# Altium PCB PCB1.PcbDoc
Units mil, origin at the board's own origin, x right, y up, seen from the top; angles counter-clockwise.
Board outline 1795 x 1645.78 mil, 2 copper layers (Top Layer, Bottom Layer); 63 components, 59 nets, 265 pads, 60 vias.
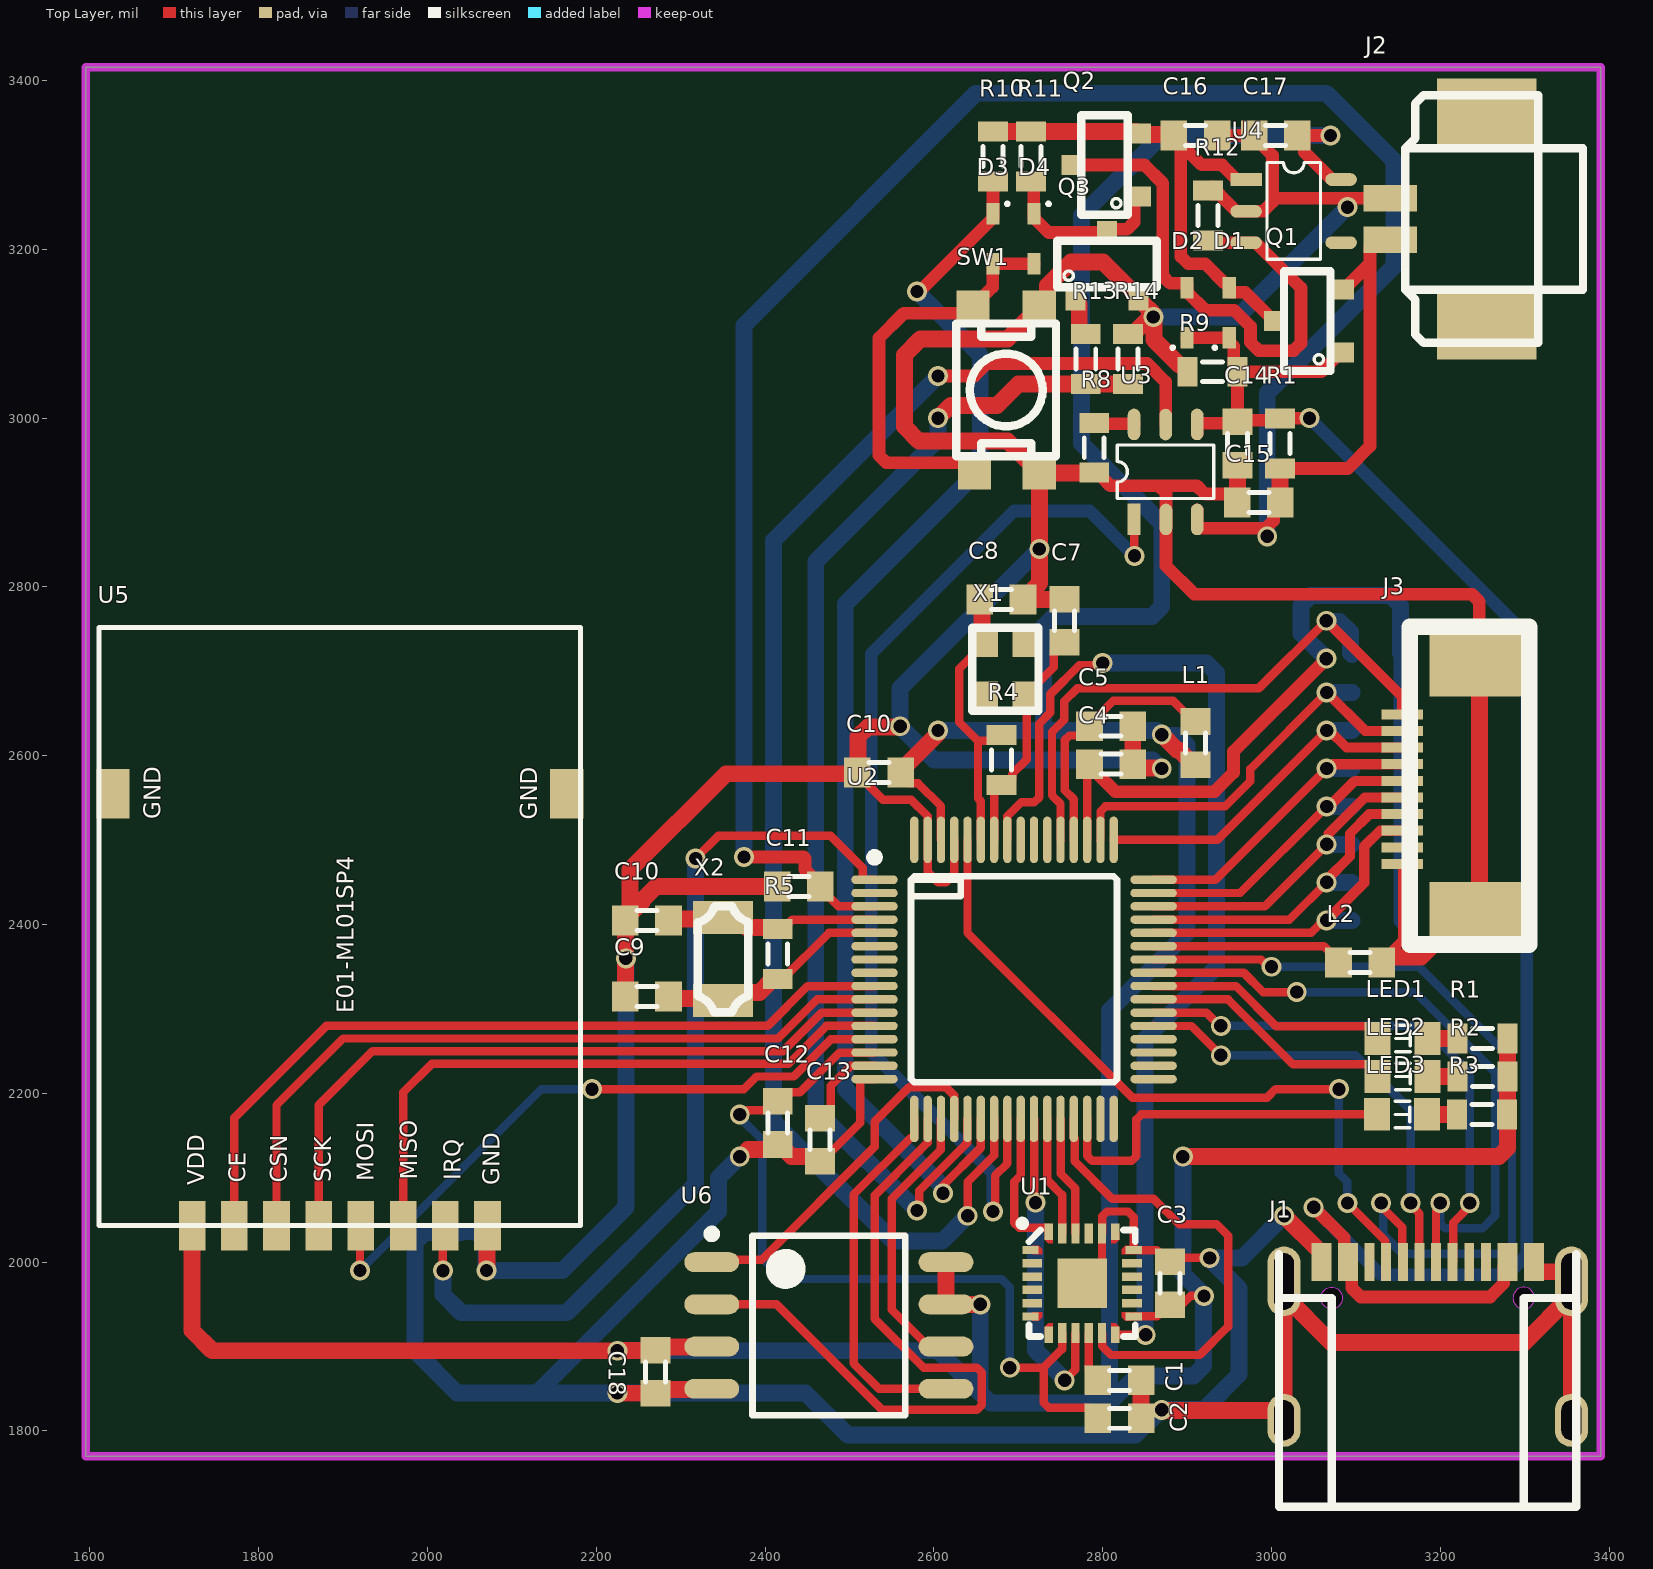
[diagram p0: Top Layer view]
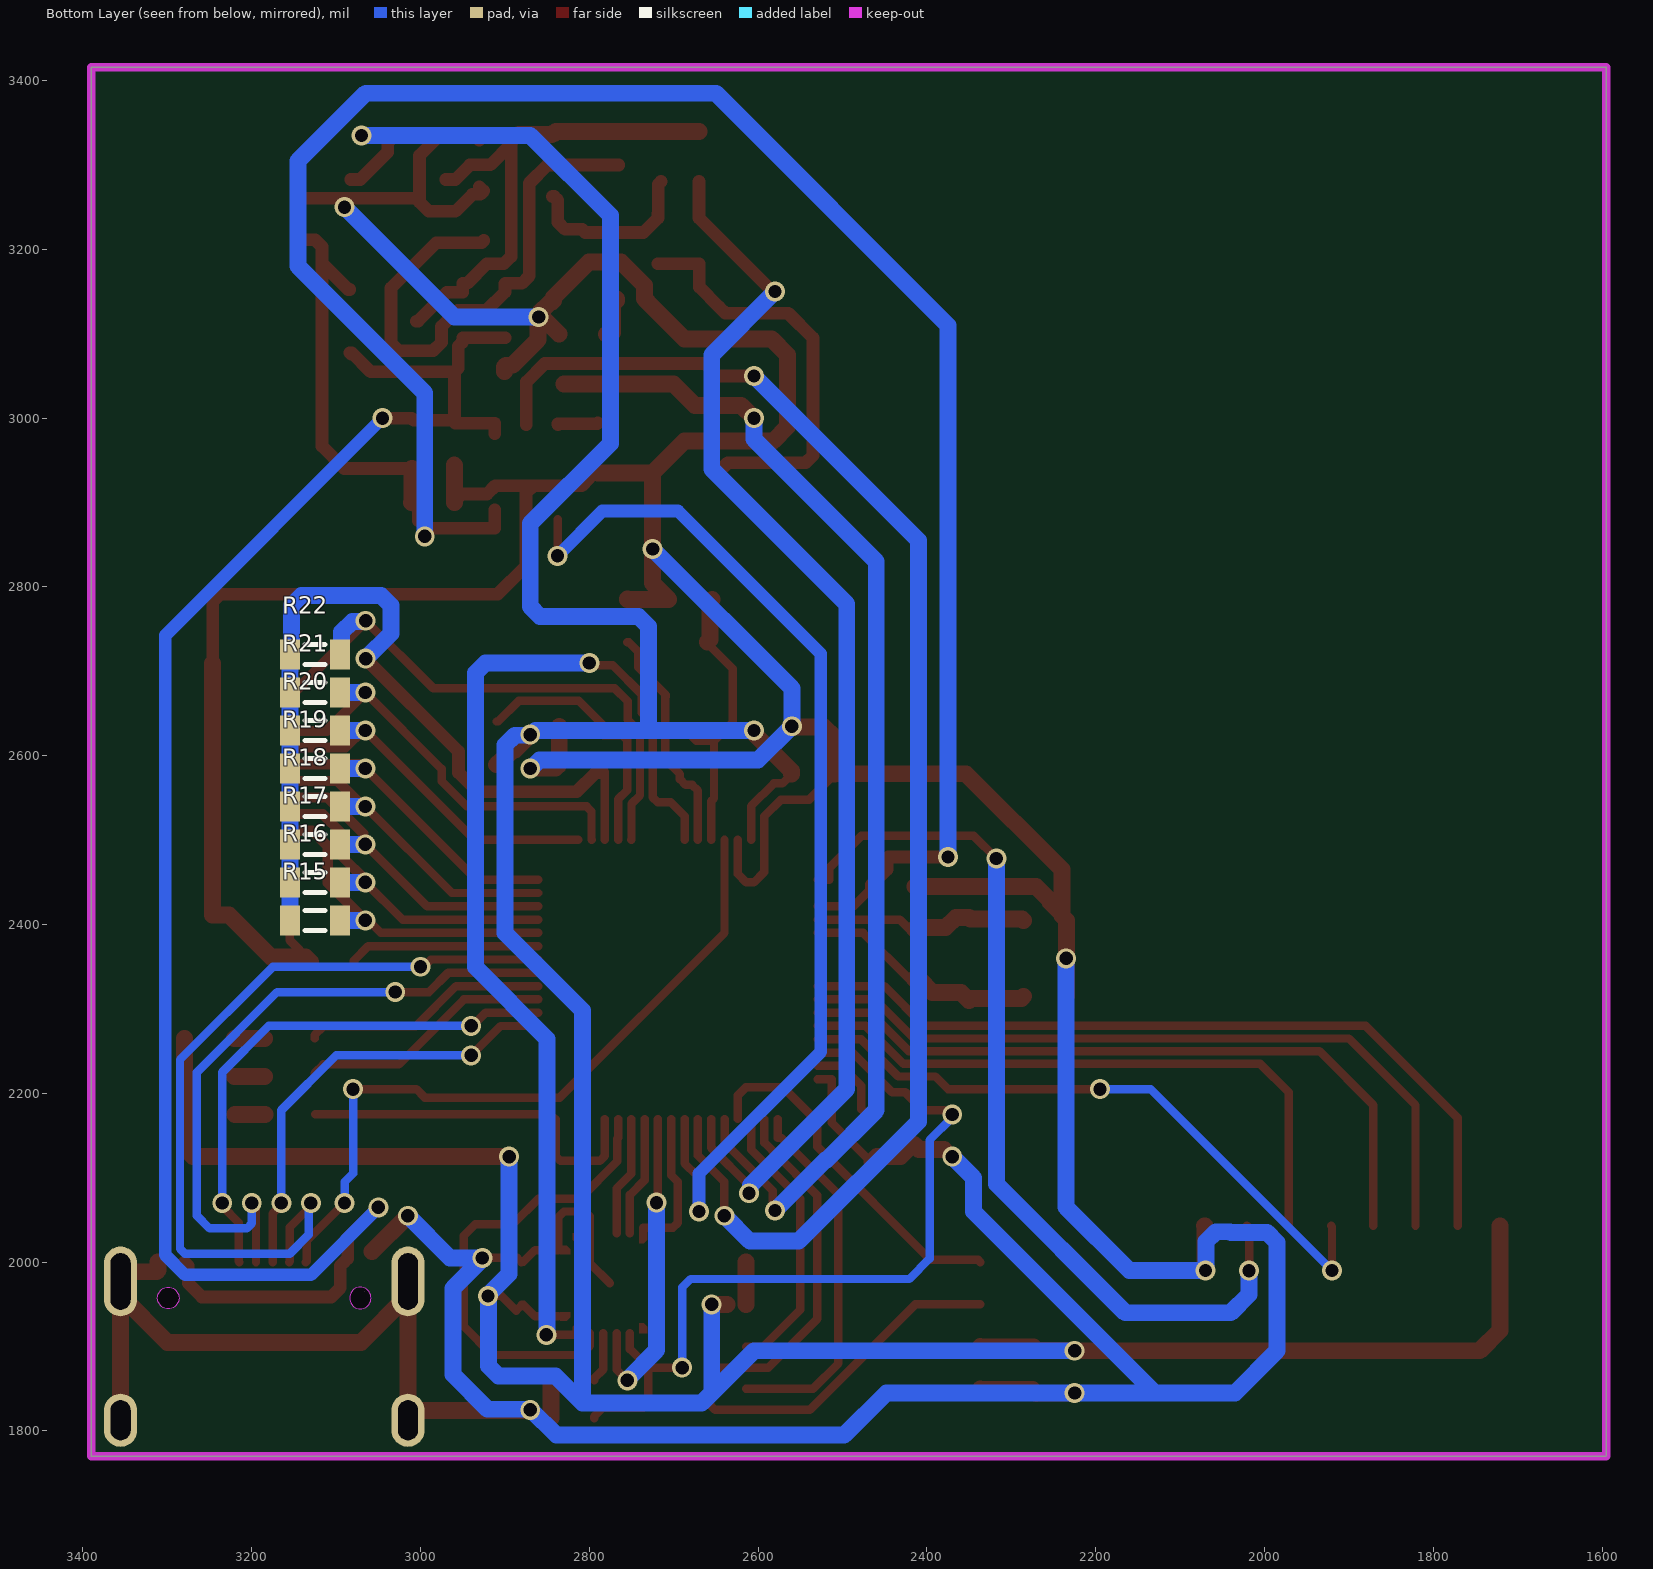
[diagram p1: Bottom Layer view, seen from below]
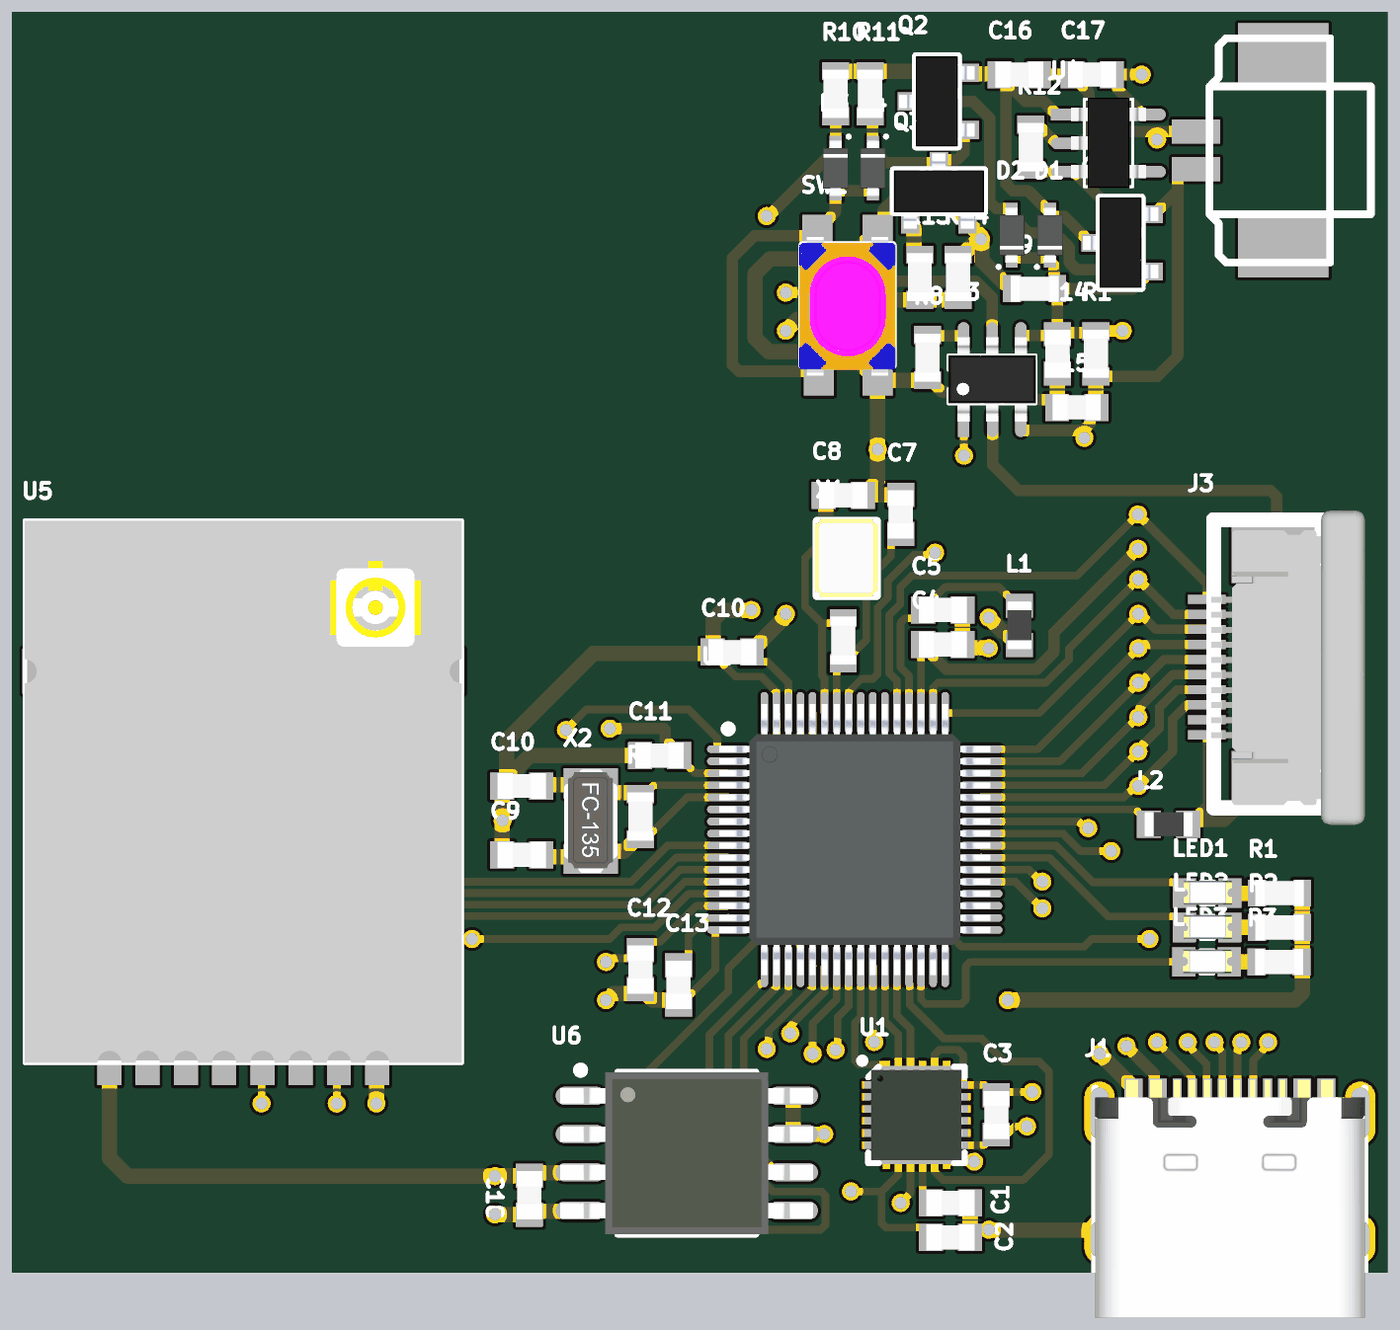
[diagram p2: 3D render of the assembled board from above, using the file's embedded part models]
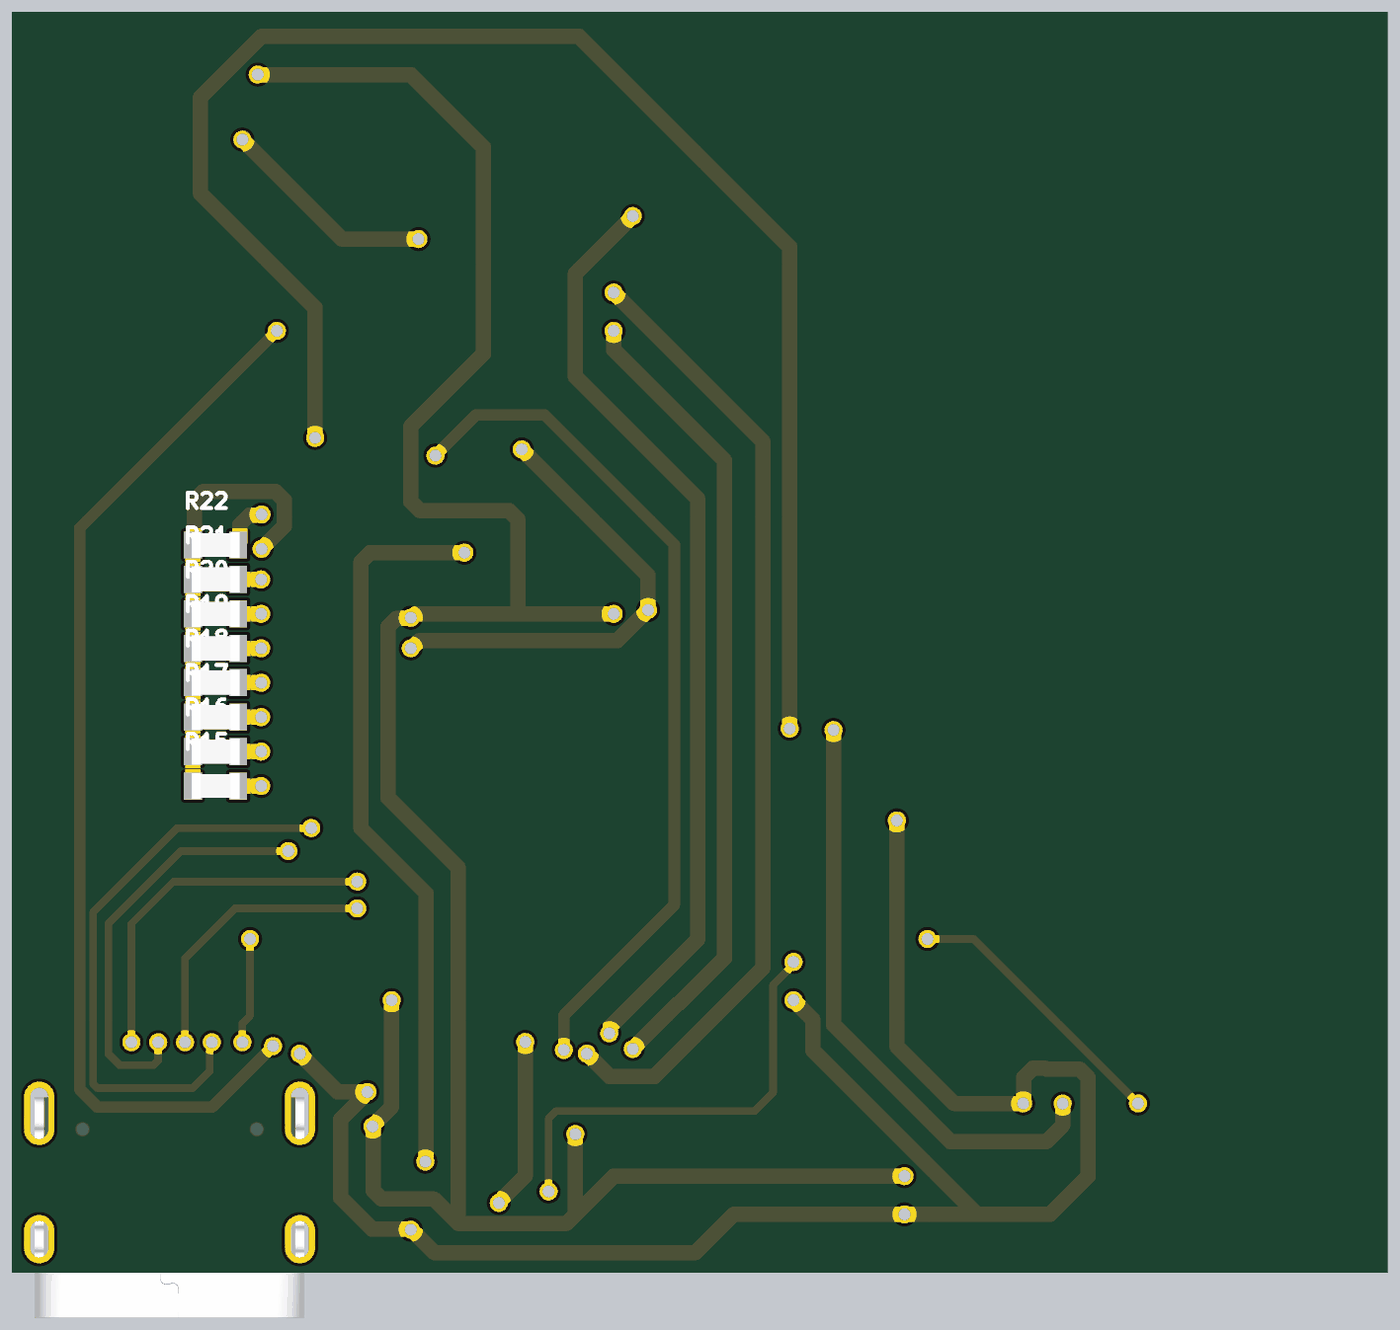
[diagram p3: 3D render of the assembled board from below, using the file's embedded part models]

## Layer stack, top to bottom
Top Solder: solder mask 0.4, Solder Resist, Dk 3.5
Top Layer: signal copper 1.4
Dielectric 1: dielectric 12.6, FR-4, Dk 4.8
Bottom Layer: signal copper 1.4
Bottom Solder: solder mask 0.4, Solder Resist, Dk 3.5

## Board outline
1595,1770 3390,1770 3390,3415.78 1595,3415.78

## Design rules (kind name [scope] priority, off if disabled: settings)
Clearance [All] p1: gap=5 ignorepadtopadclearanceinfootprint=FALSE
PolygonConnect [All] p1: connectstyle=Relief reliefconductorwidth=10 reliefentries=4 polygonreliefangle="90 Angle" airgapwidth=10
RoutingVias [All] p1: holewidth=15.75 width=23.62 viastyle="Through Hole" minholewidth=15.75 minwidth=23.62 maxholewidth=28 maxwidth=50
SolderMaskExpansion [All] p1: expansion=4 istentingtop=FALSE
Width [All] p1: maxlimit=40 minlimit=10 preferedwidth=10
30 further rules are at their usual default settings.

## Classes and differential pairs
net class ADC[0..7]: ADC0 ADC1 ADC2 ADC3 ADC4 ADC5 ADC6 ADC7
component class U_W25Q128: C18 U6
component class U_Pressure: J3 R17 R19 R21 R22
component class U_Power: C10 C12 C13 C15 D1 D4 Q1 Q2 Q3 R1 R3 R5 R8 R10 R17 SW1 U2 U3
component class U_NRF24L01_PA_LNA: U5
component class U_NANO103: C4 C7 C8 C9 C10 C11 C12 C13 C15 L1 L2 R5 R10 U2 X1 X2
component class U_ICM_20948: C1 C2 C3 U1
component class Sheet1: J1 J2 LED1 LED2 LED3 R1 R3 R8

## Components (designator, comment, footprint, x,y, rotation, side; value= is the part's Value field where it differs from the comment)
C1 "Cap" Cap_0603 2820,1860 r0 top value=0.1uf
C2 "Cap" Cap_0603 2820,1815 r0 top value=0.1uf
C3 "Cap" Cap_0603 2880,1975 r90 top value=0.1uf
C4 "Cap" Cap_0603 2810,2590 r180 top value=0.1uF
C5 "Cap" Cap_0603 2810,2635 r180 top value=0.1uF
C7 "Cap" Cap_0603 2755,2760 r90 top value=20pF
C8 "Cap" Cap_0603 2680,2785 r0 top value=20pF
C9 "Cap" Cap_0603 2260,2315 r180 top value=20pF
C10 "Cap" Cap_0603 2260,2405 r180 top value=20pF
C10 "Cap" Cap_0603 2535,2580 r0 top value=0.1uF
C11 "Cap" Cap_0603 2440,2445 r0 top value=0.1uF
C12 "Cap" Cap_0603 2415,2165 r90 top value=0.1uF
C13 "Cap" Cap_0603 2465,2145 r90 top value=0.1uF
C14 "Cap" Cap_0603 2960,2970 r270 top value=1uF
C15 "Cap" Cap_0603 2985,2900 r180 top value=10uF
C16 "Cap" Cap_0603 2910,3335 r0 top value=1uF
C17 "Cap" Cap_0603 3005,3335 r180 top value=1uF
C18 "Cap" Cap_0603 2270,1870 r270 top value=0.1uF
D1 "B5819WT" SOD-523 2950,3125 r90 top
D2 "B5819WT" SOD-523 2900,3125 r90 top
D3 "B5819WT" SOD-523 2670,3212.6 r270 top
D4 "B5819WT" SOD-523 2718.74,3212.6 r270 top
J1 "USB TYPE C" USBC-SMD16F 3014.88,1812.6 r0 top
J2 "Plug2" Terminal_block_2pin_1.25mm_SMD 3255,3235 r270 top
J3 "Plug10" FPC0.5-10PS 3155,2471.89 r90 top
L1 "Inductor" Inductor_0603 2910,2615 r270 top
L2 "Inductor" Inductor_0603 3105,2355 r0 top
LED1 "LED" SMD-0603_LED 3185,2265 r180 top
LED2 "LED" SMD-0603_LED 3185,2220 r180 top
LED3 "LED" SMD-0603_LED 3184.45,2175 r180 top
Q1 "SI2301DS-T1" SOT-23 3005,3115 r90 top
Q2 "SI2301DS-T1" SOT-23 2765,3300 r90 top
Q3 "MMS9013L-TP" SOT-23 2805,3220 r0 top
R1 "Res" RES_0603 3250,2265 r0 top value=1K
R1 "Res" RES_0603 3010,2970 r270 top value=100K
R2 "Res" RES_0603 3250,2220 r0 top value=1K
R3 "Res" RES_0603 3249.45,2175 r0 top value=1K
R4 "Res" RES_0603 2680,2595 r90 top value=1M
R5 "Res" RES_0603 2415,2365 r90 top value=1M
R8 "Res" RES_0603 2790,2965 r270 top value=1.5K
R9 "Res" RES_0603 2930,3055 r180 top value=100K
R10 "Res" RES_0603 2670,3310 r270 top value=10K
R11 "Res" RES_0603 2715,3310 r270 top value=100K
R12 "Res" RES_0603 2925,3240 r90 top value=100K
R13 "Res" RES_0603 2780,3070 r270 top value=2K
R14 "Res" RES_0603 2830,3070 r90 top value=10K
R15 "Res" RES_0603 3125,2405 r180 bottom value=10K
R16 "Res" RES_0603 3125,2450 r180 bottom value=10K
R17 "Res" RES_0603 3125,2495 r180 bottom value=10K
R18 "Res" RES_0603 3125,2540 r180 bottom value=10K
R19 "Res" RES_0603 3125,2585 r180 bottom value=10K
R20 "Res" RES_0603 3125,2630 r180 bottom value=10K
R21 "Res" RES_0603 3125,2675 r180 bottom value=10K
R22 "Res" RES_0603 3125,2720 r180 bottom value=10K
SW1 "SPST" "TACK-SW_SMD 2P 4x3mm_2" 2626.57,3112.17 r0 top
U1 "ICM-20948" QFN_24_3X3 2775.59,1974.99 r0 top
U2 "NANO103SD3AE" MCU_LQFP_64_7x7 2695,2335 r0 top
U3 "TP4059" SOT23-6 2817.13,2904.8 r90 top
U4 "AP2112K-3.3TRG1" SOT23-5 2994.8,3302.87 r0 top
U5 "NRF24L01" NRF24L01P+PA+LNA+IPX 1610.67,2751.85 r0 top
U6 "Flash" "8-Pin SOIC 208-mil" 2475.59,1924.99 r0 top
X1 "Xtal" 2520S 2709.21,2734.96 r270 top value=12MHz
X2 "Xtal" FC-135 2283.07,2372.6 r270 top value=12MHz

## Footprints (in the part's own frame and the unit in brackets; to place one, negate y for a bottom-side part, rotate by r counter-clockwise, add the part's x,y. Pads: shape width x height; smd on the part's side, far side on the other; paste and mask are expansions set on the pad)
"8-Pin SOIC 208-mil" [mm]
  oval 1.65x0.6 smd: 1(-3.525,1.905) 2(-3.525,0.635) 3(-3.525,-0.635) 4(-3.525,-1.905) 5(3.525,-1.905) 6(3.525,-0.635) 7(3.525,0.635) 8(3.525,1.905)
  silkscreen extent -3.65,-2.7 2.3,2.88, body extent -4.2,-2.69 4.2,2.69, height 2.3
2520S [mm]
  rect 0.9x0.8 smd: 1(0,-1.25) 2(1.65,0) ""(0,0) ""(1.65,-1.25)
  silkscreen extent -0.42,-1.63 2.07,0.37, body extent -0.49,-1.69 2.11,0.41, height 0.55
Cap_0603 [mm]
  rect 0.8x0.9 smd: 1(-0.65,0) 2(0.65,0)
  silkscreen extent -0.3,-0.3 0.3,0.3, body extent -0.8,-0.43 0.8,0.43, height 0.83
FC-135 [mm]
  rect 1x1.8 smd: 1(-0.91,1.7) 2(1.59,1.7)
  silkscreen extent -1.24,0.94 1.94,2.46, body extent -1.28,0.95 1.92,2.45, height 0.8
FPC0.5-10PS [mm]
  rect 0.3x1.25 smd: 1(0,0) 2(0.5,0) 3(1,0) 4(1.5,0) 5(2,0) 6(2.5,0) 7(3,0) 8(3.5,0) 9(4,0) 10(4.5,0)
  rect 2x3 smd: ""(-1.54,-2.325) ""(6.04,-2.32)
  silkscreen extent -2.42,-3.82 7.14,-0.22, body extent -2.98,-5.25 7.44,-0.14, height 2.03
Inductor_0603 [mm]
  rect 0.8x0.9 smd: 1(-0.65,0) 2(0.65,0)
  silkscreen extent -0.3,-0.3 0.3,0.3, body extent -0.8,-0.4 0.8,0.4, height 0.8
MCU_LQFP_64_7x7 [mm]
  oval 1.4x0.25 smd: 1(-4.2,3) 2(-4.2,2.6) 3(-4.2,2.2) 4(-4.2,1.8) 5(-4.2,1.4) 6(-4.2,1) 7(-4.2,0.6) 8(-4.2,0.2) 9(-4.2,-0.2) 10(-4.2,-0.6) 11(-4.2,-1) 12(-4.2,-1.4) 13(-4.2,-1.8) 14(-4.2,-2.2) 15(-4.2,-2.6) 16(-4.2,-3) 33(4.2,-3) 34(4.2,-2.6) 35(4.2,-2.2) 36(4.2,-1.8) 37(4.2,-1.4) 38(4.2,-1) 39(4.2,-0.6) 40(4.2,-0.2) 41(4.2,0.2) 42(4.2,0.6) 43(4.2,1) 44(4.2,1.4) 45(4.2,1.8) 46(4.2,2.2) 47(4.2,2.6) 48(4.2,3)
  oval 0.25x1.4 smd: 17(-3,-4.2) 18(-2.6,-4.2) 19(-2.2,-4.2) 20(-1.8,-4.2) 21(-1.4,-4.2) 22(-1,-4.2) 23(-0.6,-4.2) 24(-0.2,-4.2) 25(0.2,-4.2) 26(0.6,-4.2) 27(1,-4.2) 28(1.4,-4.2) 29(1.8,-4.2) 30(2.2,-4.2) 31(2.6,-4.2) 32(3,-4.2) 49(3,4.2) 50(2.6,4.2) 51(2.2,4.2) 52(1.8,4.2) 53(1.4,4.2) 54(1,4.2) 55(0.6,4.2) 56(0.2,4.2) 57(-0.2,4.2) 58(-0.6,4.2) 59(-1,4.2) 60(-1.4,4.2) 61(-1.8,4.2) 62(-2.2,4.2) 63(-2.6,4.2) 64(-3,4.2)
  silkscreen extent -4.32,-3.1 3.1,3.8, body extent -4.5,-4.5 4.5,4.5, height 1.55
NRF24L01P+PA+LNA+IPX [mm]
  rect 0.8x1.5 smd: 1(2.805,-18) 2(4.075,-18) 3(5.345,-18) 4(6.615,-18) 5(7.885,-18) 6(9.155,-18) 7(10.425,-18) 8(11.695,-18)
  rect 1x1.5 smd: 9(14.08,-5) 10(0.42,-5)
  silkscreen extent 0,-18 14.5,0, body extent 0,-18 14.5,0, height 2.6
QFN_24_3X3 [mm]
  rect 0.495x0.25 smd paste-1: 1(-1.553,1) 6(-1.553,-1) 13(1.552,-1) 18(1.552,1)
  rect 0.6x0.25 smd paste-1: 2(-1.5,0.6) 3(-1.5,0.2) 4(-1.5,-0.2) 5(-1.5,-0.6) 14(1.5,-0.6) 15(1.5,-0.2) 16(1.5,0.2) 17(1.5,0.6)
  rect 0.25x0.495 smd paste-1: 7(-1,-1.552) 12(1,-1.552) 19(1,1.553) 24(-1,1.553)
  rect 0.25x0.6 smd paste-1: 8(-0.6,-1.5) 9(-0.2,-1.5) 10(0.2,-1.5) 11(0.6,-1.5) 20(0.6,1.5) 21(0.2,1.5) 22(-0.2,1.5) 23(-0.6,1.5)
  rect 1.49x1.49 smd: 25(0,0)
  Top Layer region: -1.2,1.02 -1.2,0.875 -1.5,0.875 -1.5,1.125 -1.305,1.125
  Top Layer region: 1.125,-1.305 1.125,-1.5 0.875,-1.5 0.875,-1.2 1.02,-1.2
  Top Layer region: -0.875,-1.5 -1.125,-1.5 -1.125,-1.305 -1.02,-1.2 -0.875,-1.2
  Top Layer region: -1.2,-1.02 -1.305,-1.125 -1.5,-1.125 -1.5,-0.875 -1.2,-0.875
  Top Layer region: 1.5,-1.125 1.305,-1.125 1.2,-1.02 1.2,-0.875 1.5,-0.875
  Top Layer region: 1.5,0.875 1.2,0.875 1.2,1.02 1.305,1.125 1.5,1.125
  Top Layer region: 1.125,1.305 1.02,1.2 0.875,1.2 0.875,1.5 1.125,1.5
  Top Layer region: -0.875,1.2 -1.02,1.2 -1.125,1.305 -1.125,1.5 -0.875,1.5
  silkscreen extent -1.87,-1.6 1.6,1.87, body extent -1.51,-1.5 1.5,1.51, height 0.98
RES_0603 [mm]
  rect 0.6x0.9 smd: 1(-0.75,0) 2(0.75,0)
  silkscreen extent -0.3,-0.3 0.3,0.3, body extent -0.8,-0.43 0.8,0.43, height 0.48
SMD-0603_LED [mm]
  rect 0.78x0.98 smd: 1(0,0) 2(1.51,0)
  silkscreen extent 0.52,-0.4 0.97,0.4, body extent -0.08,-0.41 1.54,0.45, height 0.6
SOD-523 [mm] "SODFL, 2-Leads, Body 0.80x1.60mm, IPC Medium Density"
  rect 0.65x0.4 smd: 1(-0.75,0) 2(0.75,0)
  silkscreen extent -1.1,0.38 -1,0.48, body extent -0.91,-0.42 0.92,0.42, height 0.71
SOT23-5 [mm]
  rect 0.95x0.38 smd: 1(-0.63,-0.51)
  oval 0.95x0.38 smd: 2(-0.63,-1.47) 3(-0.63,-2.41) 4(2.23,-2.41) 5(2.23,-0.51)
  silkscreen extent 0,-2.91 1.61,0, body extent -0.44,-2.95 2.06,0.05, height 1.09
SOT23-6 [mm]
  rect 0.95x0.38 smd: 1(-0.63,-0.51)
  oval 0.95x0.38 smd: 2(-0.63,-1.47) 3(-0.63,-2.41) 4(2.23,-2.41) 5(2.227,-1.461) 6(2.23,-0.51)
  silkscreen extent 0,-2.91 1.61,0, body extent -0.59,-2.91 2.21,-0.01, height 1.45
SOT-23 [mm]
  rect 0.6x0.7 smd: 1(-0.95,-2) 2(0.95,-2) 3(0,0)
  silkscreen extent -1.5,-1.65 1.5,-0.25, body extent -1.5,-2.2 1.5,0.3, height 1.05
"TACK-SW_SMD 2P 4x3mm_2" [mm]
  rect 1x1 smd: 1(0.5,0.5) 1(0.55,-4.5) 2(2.5,-4.5) 2(2.5,0.5)
  silkscreen extent 0,-4 3,0, body extent -0.1,-4.33 3.1,0.26, height 2.5
Terminal_block_2pin_1.25mm_SMD [mm]
  rect 0.8x1.6 smd: 1(-0.65,-2.9) 2(0.6,-2.9)
  rect 2.1x3 smd: ""(-3.2,0) ""(3.15,0)
  silkscreen extent -3.75,-2.45 3.7,2.9
USBC-SMD16F [mm]
  rect 0.6x1.15 smd: 1(1.125,4.76) 2(1.925,4.76) 11(6.725,4.76) 12(7.525,4.76)
  rect 0.3x1.15 smd: 3(2.575,4.76) 4(3.075,4.76) 5(3.575,4.76) 6(4.075,4.76) 7(4.575,4.76) 8(5.075,4.76) 9(5.575,4.76) 10(6.075,4.76)
  oval 1x1.6 hole 0.6 slot 1.2 at 90 deg: ""(0,0) ""(8.65,0)
  oval 1x2.1 hole 0.6 slot 1.7 at 90 deg: ""(0,4.18) ""(8.65,4.18)
  Keep-Out Layer board cut-out: 1.435,3.355 1.311,3.38 1.205,3.45 1.135,3.556 1.11,3.68 1.11,3.68 1.135,3.804 1.205,3.91 1.311,3.98 1.435,4.005 1.435,4.005 1.559,3.98 1.665,3.91 1.735,3.804 1.76,3.68 1.76,3.68 1.735,3.556 1.665,3.45 1.559,3.38 1.435,3.355
  Keep-Out Layer board cut-out: 6.89,3.68 6.915,3.556 6.985,3.45 7.091,3.38 7.215,3.355 7.215,3.355 7.339,3.38 7.445,3.45 7.515,3.556 7.54,3.68 7.54,3.68 7.515,3.804 7.445,3.91 7.339,3.98 7.215,4.005 7.215,4.005 7.091,3.98 6.985,3.91 6.915,3.804 6.89,3.68
  Keep-Out Layer pour cut-out: 1.31,3.87
  silkscreen extent -0.15,-2.6 8.8,5, body extent -0.15,-2.6 8.8,5.3, height 3.16

## Part data
D1 D2 D3 D4: "Diode Schottky 40V 1A 2-Pin SOD-523 T/R", Average Rectified Current=1A, Forward Voltage=550mV, Manufacturer=MCC, Manufacturer Part Number=B5819W-TP, Max Forward Surge Current (Ifsm)=10A, Max Operating Temperature=125°C, Max Power Dissipation=250mW, Max Repetitive Reverse Voltage (Vrrm)=40V, Max Reverse Voltage (DC)=20V, Min Operating Temperature=-65°C, Package Quantity=3000, Peak Reverse Current=1mA, Category="Rectifier Diodes", ComponentLink1Description=https://datasheet.ciiva.com/6378/b5817w-b5819wsod-123-6378255.pdf?src-supplier=Digi-Key, ComponentLink1URL=https://datasheet.ciiva.com/6378/b5817w-b5819wsod-123-6378255.pdf?src-supplier=Digi-Key, Element Configuration=Single, Forward Current=1A, Mount="Surface Mount", Packaging="Tape and Reel", Pricing 1="1=0.38000, 10=0.28000, 25=0.24520, 100=0.13300, 250=0.13232, 500=0.10850, 1000=0.08050 (USD)", Reverse Voltage (DC)=40V, RoHS=Yes, Stock 1=1380, Supplier 1=Digi-Key, Supplier Part Number 1=B5819WT
J1: "USB Shielded I/O Receptacle; Type C; Right Angle; Surface Mount; Gold over Nickel", Case/Package=0101, Current Rating=5A, Flammability Rating="UL94 V-0", Insulation Color=Black, Manufacturer=Molex, Manufacturer Part Number=105450-0101, Max Operating Temperature=85°C, Min Operating Temperature=-30°C, Supplier Part Number 1=WM12856DKR-ND, Category=Connectors, ComponentLink1Description=http://www.farnell.com/datasheets/2801634.pdf?src-supplier=Farnell, ComponentLink1URL=http://www.farnell.com/datasheets/2801634.pdf?src-supplier=Farnell, ComponentLink2Description=http://www.farnell.com/datasheets/2672741.pdf?src-supplier=Newark, ComponentLink2URL=http://www.farnell.com/datasheets/2672741.pdf?src-supplier=Newark, ComponentLink3Description=http://www.farnell.com/datasheets/2015275.pdf?src-supplier=Element14, ComponentLink3URL=http://www.farnell.com/datasheets/2015275.pdf?src-supplier=Element14, ComponentLink4Description=https://www.molex.com/pdm_docs/ps/PS-105448-001.pdf?src-supplier=Digi-Key, ComponentLink4URL=https://www.molex.com/pdm_docs/ps/PS-105448-001.pdf?src-supplier=Digi-Key, ComponentLink5Description=http://www.farnell.com/datasheets/2801634.pdf?src-supplier=Newark, ComponentLink5URL=http://www.farnell.com/datasheets/2801634.pdf?src-supplier=Newark, ComponentLink6Description=https://www.molex.com/pdm_docs/sd/1054500101_sd.pdf?src-supplier=Digi-Key, ComponentLink6URL=https://www.molex.com/pdm_docs/sd/1054500101_sd.pdf?src-supplier=Digi-Key, ComponentLink7Description=http://www.farnell.com/datasheets/2801634.pdf?src-supplier=Element14, ComponentLink7URL=http://www.farnell.com/datasheets/2801634.pdf?src-supplier=Element14, ComponentLink8Description=http://www.literature.molex.com/SQLImages/kelmscott/Molex/PDF_Images/987651-4081.PDF?src-supplier=Avnet, ComponentLink8URL=http://www.literature.molex.com/SQLImages/kelmscott/Molex/PDF_Images/987651-4081.PDF?src-supplier=Avnet, ComponentLink9Description=http://www.literature.molex.com/SQLImages/kelmscott/Molex/PDF_Images/987651-4081.PDF?src-supplier=Avnet+Asia, ComponentLink9URL=http://www.literature.molex.com/SQLImages/kelmscott/Molex/PDF_Images/987651-4081.PDF?src-supplier=Avnet+Asia, Connector Type=USB, Contact Material="Copper Alloy", Contact Plating=Gold, Features=Shielded, Gender=Receptacle, Housing Material=Thermoplastic, Length=8.94mm, Mating Cycles=10000, Mount="Surface Mount,Through Hole,Horizontal", Number of Contacts=24, Number of Pins=24, Number of Ports=1, Number of Terminals=24, Orientation="Right Angle", Packaging="Tape and Reel", Pitch=0.5mm, Pricing 1="1=2.15000, 10=1.94900, 25=1.82960, 50=1.75000, 100=1.67050, 250=1.51140, 500=1.39208 (USD)", REACH SVHC=Unknown, RoHS=Yes, Shielding=Shielded, Stock 1=21711, Supplier 1=Digi-Key, Termination=Solder, USB Standard="USB 3.1"
Q1 Q2: "Trans MOSFET P-CH 20V 2.3A 3-Pin TO-236 T/R", Case/Package=SOT-23-3, Continuous Drain Current (ID)=2.3A, Drain to Source Resistance=130mR, Drain to Source Voltage (Vdss)=-20V, Gate to Source Voltage (Vgs)=8V, Manufacturer="Vishay Siliconix", Max Operating Temperature=150°C, Max Power Dissipation=1.25W, Min Operating Temperature=-55°C, Package Quantity=3000, Category=MOSFETs, ComponentLink1Description=https://datasheet.ciiva.com/13048/70627-115154-13048148.pdf?src-supplier=Mouser, ComponentLink1URL=https://datasheet.ciiva.com/13048/70627-115154-13048148.pdf?src-supplier=Mouser, Element Configuration=Single, Fall Time=36ns, Height=1.02mm, Length=3.04mm, Manufacturer Part Number=SI2301DS-T1, Mount="Surface Mount", Number of Channels=1, Number of Elements=1, Number of Pins=3, Packaging="Tape and Reel", Polarity=P-CH, Power Dissipation=1.25W, Pricing 1="143=0.17500, 500=0.15000, 1000=0.10000, 5000=0.09000, 10000=0.08000 (USD)", Rise Time=36ns, RoHS=No, Stock 1=12531, Supplier 1="Component Sense", Supplier Part Number 1=SI2301DS-T1, Turn-Off Delay Time=42ns, Turn-On Delay Time=13ns, Weight=0.050717oz, Width=1.4mm
Q3: "Trans GP BJT NPN 25V 0.5A 3-Pin SOT-23 T/R", Case/Package=SOT-23, Collector Base Voltage (VCBO)=40V, Collector Emitter Voltage (VCEO)=25V, Emitter Base Voltage (VEBO)=5V, Frequency=150MHz, Manufacturer=MCC, Max Operating Temperature=150°C, Min Operating Temperature=-55°C, Power Dissipation=300mW, Supplier Part Number 1=MMS9013-L-TP, Category=BJTs, ComponentLink1Description=http://components.arrow.com/part/dataview/51062823S110403N2022?src-supplier=Arrow, ComponentLink1URL=http://components.arrow.com/part/dataview/51062823S110403N2022?src-supplier=Arrow, Manufacturer Part Number=MMS9013L-TP, Mount="Surface Mount", Number of Elements=1, Number of Pins=3, Packaging="Tape and Reel", Polarity=NPN, RoHS=Yes, Supplier 1=Arrow
SW1: library part Switch_Button1
U1: "Accelerometer, Gyroscope, Magnetometer, 9 Axis Sensor IÂ²C, SPI Output", Package="QFN-24 InvenSense", Availability=Unavailable, MF="TDK InvenSense", MP=ICM-20948, Price=None, SnapEDA_Link=https://www.snapeda.com/parts/ICM-20948/TDK%20InvenSense/view-part/578927/?ref=snap
U3: "600MA SOT23-6", ComponentLink1Description=Datasheet, ComponentLink1URL=http://www.tp-asic.com/res/tp-asic/pdres/201403/TP4059.pdf
U4: "IC REG LINEAR 3.3V 600MA SOT23-5", Case/Package=SOT-23-5, Dropout Voltage=250mV, Manufacturer=Diodes, Max Input Voltage=6V, Max Operating Temperature=85°C, Max Output Current=600mA, Min Input Voltage=2.5V, Min Operating Temperature=-40°C, Output Voltage=3.3V, Package Quantity=1, Quiescent Current=55uA, Supplier Part Number 1=AP2112K-3.3TRG1DICT-ND, Accuracy=1.5%, Category="Voltage Regulators - Linear", ComponentLink1Description=https://datasheet.ciiva.com/29569/ap2112-29569919.pdf?src-supplier=Digi-Key, ComponentLink1URL=https://datasheet.ciiva.com/29569/ap2112-29569919.pdf?src-supplier=Digi-Key, ComponentLink2Description=https://datasheet.ciiva.com/30016/ap2112-30016792.pdf?src-supplier=Avnet, ComponentLink2URL=https://datasheet.ciiva.com/30016/ap2112-30016792.pdf?src-supplier=Avnet, ComponentLink3Description=https://datasheet.ciiva.com/29569/ap2112-29569917.pdf?src-supplier=Digi-Key, ComponentLink3URL=https://datasheet.ciiva.com/29569/ap2112-29569917.pdf?src-supplier=Digi-Key, ComponentLink4Description=https://datasheet.ciiva.com/29569/ap2112-29569918.pdf?src-supplier=Digi-Key, ComponentLink4URL=https://datasheet.ciiva.com/29569/ap2112-29569918.pdf?src-supplier=Digi-Key, Height=1.3mm, Lead Free="Lead Free", Length=3.1mm, Manufacturer Part Number=AP2112K-3.3TRG1, Mount="Surface Mount", Number of Outputs=1, Number of Pins=5, Number of Regulators=1, Output Current=600mA, Output Type=Fixed, Packaging="Tape and Reel", Polarity=Positive, Pricing 1="1=0.47000, 10=0.35500, 25=0.32000, 100=0.17450, 250=0.16872, 500=0.15126, 1000=0.11636 (USD)", RoHS=Yes, Stock 1=54786, Supplier 1=Digi-Key, Width=1.7mm
U5: library part NRF24L01_module
U6: library part W25QXX
U2: OriginalSymbolOrigin=(0,0)

## Via types
v1: diameter 23.62, hole 15.75, Top Layer to Bottom Layer, 60 vias

## Nets (pads, with @x,y where several pads share a name; then routed paths per layer and width w, separated by ;. In a path a pad name is that pad's centre, name@x,y a point inside that pad or via, vN(x,y) a via of type N, cw(c..) or ccw(c..) an arc to the next point about the centre after c; other vN are vias at no path point)
12M_I: C7.1 R4.1 U2.58 X1.2 | length 275
  Top Layer w10: U2.58 2671.38,2558.67 2678.19,2565.48 R4.1 2685.9,2565.48 2692.71,2572.29 2692.71,2578.19 2710,2595.48 2710,2669.21 X1.2 2709.21,2671.97 2742.28,2705.03 2742.28,2723.66 2753.03,2734.41 C7.1
12M_O: C8.1 R4.2 U2.59 X1.1 | length 340.5
  Top Layer w10: U2.59 U2.59 2655.55,2546.25 2652.28,2549.52 2652.28,2617.72 ; X1.1 2660,2732.99 2630,2702.99 2630,2640 2652.28,2617.72 ; R4.2 2673.19,2617.72 2652.28,2617.72
  Top Layer w20: C8.1 2657.2,2782.21 2657.2,2737.76 X1.1
/RESET: J1.4 U2.60 | length 863.5
  Top Layer w10: U2.60 2639.88,2390.12 2835,2195 2995,2195 3005,2205 v1(3080,2205) ; v1(3090,2070) 3135.04,2024.96 3135.04,2000.91 J1.4
  Bottom Layer w10: v1(3080,2205) 3080,2105 3090,2095 v1(3090,2070)
ADC0: J3.3 R15.2 U2.44 | length 400.1
  Top Layer w10: U2.44 3046.9,2390.12 3061.79,2405.01 v1(3065.48,2405.01)
  Top Layer w12: v1(3065.48,2405.01) 3110,2449.53 3110,2492.64 3128.52,2511.17 3154.91,2511.17 J3.3
  Bottom Layer w20: v1(3065.48,2405.01) R15.2
ADC1: J3.4 R16.2 U2.45 | length 394.3
  Top Layer w10: U2.45 3021.34,2405.87 v1(3065.48,2450.01)
  Top Layer w12: v1(3065.48,2450.01) 3065.48,2453.15 3093,2480.67 3093,2508 3115.85,2530.85 3154.91,2530.85 J3.4
  Bottom Layer w20: v1(3065.48,2450.01) R16.2
ADC2: J3.5 R17.2 U2.46 | length 384.2
  Top Layer w10: U2.46 2992.08,2421.61 v1(3065.48,2495.01)
  Top Layer w12: v1(3065.48,2495.01) 3067.7,2497.23 3067.7,2507.7 3110.54,2550.54 3154.91,2550.54 J3.5
  Bottom Layer w20: v1(3065.48,2495.01) R17.2
ADC3: J3.6 R18.2 U2.47 | length 379.7
  Top Layer w10: U2.47 2962.83,2437.36 v1(3065.48,2540.01)
  Top Layer w12: v1(3065.48,2540.01) 3068.62,2540.01 3098.84,2570.22 3154.91,2570.22 J3.6
  Bottom Layer w20: v1(3065.48,2540.01) R18.2
ADC4: J3.7 R19.2 U2.48 | length 381.3
  Top Layer w10: U2.48 2933.58,2453.11 v1(3065.48,2585.01)
  Top Layer w12: v1(3065.48,2585.01) 3068.62,2585.01 3073.62,2590 J3.7
  Bottom Layer w20: v1(3065.48,2585.01) R19.2
ADC5: J3.8 R20.2 U2.49 | length 434
  Top Layer w10: U2.49 2935.82,2500.35 v1(3065.48,2630.01)
  Top Layer w12: v1(3065.48,2630.01) 3068.62,2630.01 3088.85,2609.78 3154.91,2609.78 J3.8
  Bottom Layer w20: v1(3065.48,2630.01) R20.2
ADC6: J3.9 R21.2 U2.50 | length 507.1
  Top Layer w10: U2.50 U2.50 2797.44,2534.14 2803.3,2540 2945,2540 2975,2570 2975,2584.53 v1(3065.48,2675.01)
  Top Layer w12: v1(3065.48,2675.01) 3111.02,2629.46 3154.91,2629.46 J3.9
  Bottom Layer w20: v1(3065.48,2675.01) R21.2
ADC7: J3.10 R22.2 U2.53 | length 734.1
  Top Layer w10: U2.53 2750.04,2500.43 2750.04,2543.1 2740,2553.14 2740,2628.19 2754.4,2642.59 2754.4,2664.4 2770,2680 2985,2680 v1(3065,2760)
  Top Layer w12: v1(3065,2760) 3155,2670 J3.10
  Bottom Layer w20: v1(3065,2760) 3065.69,2759.31 3080.83,2759.31 3093.67,2746.47 3093.67,2721.82 R22.2
AVDD: C5.2 L1.1 U2.52 | length 303.9
  Top Layer w10: U2.52 2765.79,2500.43 2765.79,2548.56 2755,2559.35 2755,2618.34 2760.69,2624.03 2783.45,2624.03 C5.2@2784.41,2624.99 ; C5.2 2784.41,2636.96 2812.45,2665 2883.63,2665 2908.03,2640.6 L1.1
AVSS: L2.1 U2.43 | length 229.1
  Top Layer w10: U2.43 3062.01,2374.37 3079.4,2356.97 L2.1 L2.1@3078.77,2354.37
CE: U2.9 U5.2 | length 951.1
  Top Layer w10: U5.2 1771.1,2171.1 1880,2280 2403.19,2280 2450.31,2327.13 U2.9
ICE_CLK: J1.5 U2.42 | length 981.3
  Top Layer w10: U2.42 2987.69,2358.62 2996.31,2350 v1(3000,2350) ; v1(3130,2070) 3130,2066.31 3154.72,2041.59 3154.72,2000.91 J1.5
  Bottom Layer w10: v1(3000,2350) 3175,2350 3285,2240 3285,2015.86 3279.14,2010 3155,2010 3132.61,2032.39 3132.61,2067.39 v1(3130,2070)
ICE_DAT: J1.7 U2.41 | length 793.3
  Top Layer w10: U2.41 2967.13,2342.87 2990,2320 v1(3030,2320) ; J1.7 3195,2061.31 3200,2066.31 v1(3200,2070)
  Bottom Layer w10: v1(3030,2320) 3170,2320 3265,2225 3265,2055 3250,2040 3205.86,2040 3200,2045.86 v1(3200,2070)
INT: U2.1 U5.7 | length 1092.5
  Top Layer w10: v1(2018.32,1989.86) 2018.32,2040.41 U5.7 ; v1(2317.76,2478.19) 2344.57,2505 2477.76,2505 2515.5,2467.25 2515.5,2453.19 2515.58,2453.11 U2.1
  Bottom Layer w20: v1(2018.32,1989.86) 2018.32,1961.68 2040,1940 2165,1940 2317.76,2092.76 v1(2317.76,2478.19)
INT1: U1.12 U2.57 | length 1275.9
  Top Layer w10: U2.57 2687.2,2500.43 2687.2,2528.42 2703.78,2545 2719.14,2545 2725,2550.86 2725,2638.18 2737.95,2651.13 2737.95,2672.95 2772.39,2707.39 2797.39,2707.39 v1(2800,2710) ; U1.12 v1(2850.97,1913.89)
  Bottom Layer w20: v1(2800,2710) 2923.28,2710 2935,2698.28 2935,2349.63 2850,2264.63 2850,1948.87 2850.28,1948.59 2850.28,1914.58 v1(2850.97,1913.89)
LDO: C2.1 C12.2 U1.8 U2.14 | length 979.1
  Top Layer w10: v1(2370,2175) 2373.69,2175 2378.53,2179.84 2404.25,2179.84 C12.2 2425.74,2201.34 2441.34,2201.34 2488.31,2248.31 2529.57,2248.31 U2.14 ; v1(2690,1875) 2730,1875 ; U1.8 2751.89,1915.86 2751.89,1896.89 2730,1875 ; C2.1 2794.41,1816.97 2783.66,1827.72 2735.86,1827.72 2730,1833.58 2730,1875
  Bottom Layer w10: v1(2370,2175) 2370,2171.31 2396.73,2144.58 2396.73,2004.13 2420.86,1980 2680.07,1980 2690,1970.07 v1(2690,1875)
NetC1_1: C1.1 U1.10 | length 60.5
  Top Layer w10: U1.10 U1.10 2783.54,1872.84 2794.41,1861.97 C1.1
NetC4_1: C14.1 D1.1 D2.1 J1.2 J1.11 Q1.1 R1.1@3010.01,2999.52 R9.1 U3.4 | length 2164.1
  Top Layer w15: D2.1 D1.1 2950,3090.55 2955.21,3085.34 2955.21,3059.3 R9.1 ; U3.4@2912.01,2981.42 U3.4 U3.4@2912.01,2994.07 ; U3.4@2912.03,2994.09 2958.51,2994.09 C14.1 ; v1(3045,3000) 3044.76,2999.76 3010.25,2999.76 3010.01,2999.52 3008.04,2997.56 2961.97,2997.56 C14.1 ; v1(3050,2065) 3086.36,2028.64 3086.36,2004.31 J1.2 3094.98,1995.69 3094.98,1969.65 3105.84,1958.79 3259.06,1958.79 3275.33,1975.06 3275.33,1995.69 J1.11 ; Q1.1@3081.87,3075.73 Q1.1 3081.77,3077.6 3059.17,3054.99 R9.1 ; R9.1 2959.76,3054.75 2959.76,2995.83 C14.1
  Bottom Layer w15: v1(3045,3000) 3302.5,2742.5 3302.5,2008.61 3278.89,1985 3130,1985 v1(3050,2065)
NetC6_1: C16.1 D1.2 Q1.3 Q2.2 R10.1 R11.1 U4.1 | length 607.6
  Top Layer w15: C16.1 2892.72,3326.7 2892.72,3191.67 2901.5,3182.88 2921.64,3182.88 2944.7,3159.82 2949.63,3159.82 2950,3159.45 D1.2 2950,3149.61 2950.37,3149.23 2968.8,3149.23 3003.03,3115 Q1.3 ; C16.1@2892.72,3324.73 2917.33,3300.12 2941.61,3300.12 2958.8,3282.93 2958.8,3282.82 U4.1
  Top Layer w20: R10.1 R11.1 2839.65,3339.52 2841.77,3337.4 Q2.2 2844.94,3336.2 2883.21,3336.2 C16.1
NetC17_2: C13.2 U2.15 | length 106.4
  Top Layer w10: C13.2 2466.96,2170.59 2477.71,2181.34 2477.71,2208.69 2501.58,2232.56 U2.15 U2.15
NetD2_2: D3.2 D4.2 SW1.1 | length 497.3
  Top Layer w15: SW1.1@2648.23,2935 2636.04,2947.19 2543.79,2947.19 2535,2955.97 2535,3095 2564.28,3124.28 2638.69,3124.28 2646.26,3131.85 2669.63,3155.22 2669.63,3182.7 D3.2 D4.2
NetD3_1: D4.1 Q2.1 Q3.3 R11.2 | length 209.7
  Top Layer w15: R11.2 2718.37,3277.11 2718.37,3242.5 D4.1 2718.74,3237.2 2735.94,3220 Q3.3 2808.74,3223.74 2828.67,3223.74 2837.46,3232.52 2837.46,3258.29 2841.77,3262.6 Q2.1
NetD4_2: D2.2 Q2.3 R12.1 U4.3 | length 644.6
  Top Layer w15: Q2.3 2849.61,3300 2871.19,3278.41 2871.19,3168.61 2879.98,3159.82 2899.63,3159.82 2900,3159.45 D2.2 2900,3149.61 2921.59,3128.02 2955.8,3128.02 2975.21,3108.61 2975.21,3089.79 2985,3080 3026.21,3080 3035,3088.79 3035,3154.17 2981.18,3207.99 U4.3 2927.46,3208.01 R12.1
NetLED1_1: LED1.1 R1.1@3220.48,2265.01 | length 35.5
  Top Layer w20: LED1.1 R1.1@3220.47,2265
NetLED2_1: LED2.1 R2.1 | length 35.5
  Top Layer w20: LED2.1 R2.1
NetLED3_1: LED3.1 R3.1 | length 35.5
  Top Layer w20: LED3.1@3184.45,2175 R3.1
NetQ3_2: Q3.1 R13.1 | length 50.3
  Top Layer w20: Q3.1 2767.6,3139.29 2772.29,3134.6 2772.29,3101.33 2774.1,3099.52 R13.1
NetR2_1: R8.1 U3.6 | length 48.5
  Top Layer w15: R8.1 2790.97,2993.56 2837.18,2993.56 U3.6
PA12_PWM0: LED1.2 U2.40 | length 293.2
  Top Layer w10: U2.40 2860.43,2327.05 2957.95,2327.05 3005.71,2279.29 3115.2,2279.29 3125.55,2268.94 LED1.2
PA13_PWM1: LED2.2 U2.39 | length 305.4
  Top Layer w10: U2.39 2860.43,2311.3 2948.7,2311.3 3025.71,2234.29 3115.2,2234.29 3125.55,2223.94 LED2.2
PB11_PWM4: LED3.2 U2.30 | length 437.7
  Top Layer w10: U2.30 2781.69,2169.57 2781.69,2125.86 2787.55,2120 2834.14,2120 2840,2125.86 2840,2169.14 2845.86,2175 LED3.2
PD6: R13.2 R14.1 U2.21 | length 1424.2
  Top Layer w10: v1(2580,2061.24) 2582.61,2063.84 2582.61,2084.38 2639.8,2141.58 2639.8,2169.57 U2.21
  Top Layer w20: v1(2605,3000) 2620,3015 2675,3015 2700.47,3040.47 R13.2 R14.1
  Bottom Layer w20: v1(2580,2061.24) 2520.27,2120.96 2519.04,2120.96 2460,2180 2460,2830 2605,2975 v1(2605,3000)
PD7: D3.1 R10.2 U2.22 | length 1490
  Top Layer w10: v1(2610.71,2081.64) 2610.32,2082.03 2610.32,2090.32 2655.55,2135.55 U2.22 U2.22
  Top Layer w15: v1(2580,3150) 2582.8,3150 2670,3237.2 D3.1 R10.2
  Bottom Layer w20: v1(2580,3150) 2655,3075 2655,2940 2495,2780 2495,2205 2609.31,2090.69 2609.31,2083.04 v1(2610.71,2081.64)
PD14: U2.23 U3.5 | length 1729.3
  Top Layer w10: v1(2640,2055) 2640,2056.96 2638.48,2058.48 2640,2060 2640,2095 2671.38,2126.38 U2.23
  Top Layer w15: v1(2605,3050) 2648.18,3050 2662.97,3064.79 2852.89,3064.79 2874.63,3043.05 U3.5
  Bottom Layer w20: v1(2605,3050) 2410,2855 2410,2166.85 2551.85,2025 2610,2025 v1(2640,2055)
PD15: U2.24 U3.1 | length 1284.8
  Top Layer w10: v1(2670,2060) 2672.61,2062.61 2672.61,2102.61 2687.05,2117.05 2687.05,2169.57 U2.24 ; U3.1 2837.51,2879.7 2837.51,2837.2 v1(2837.81,2836.9)
  Bottom Layer w15: v1(2670,2060) 2670,2105 2525.69,2249.31 2525.69,2720.69 2695,2890 2784.7,2890 v1(2837.81,2836.9)
PE5: U1.11 U2.29 | length 559.5
  Top Layer w10: U2.29 2765.87,2147.17 2766.69,2146.34 2766.69,2119.64 2811.34,2075 2860.51,2075 2890.51,2045 2935,2045 2948.62,2031.38 2948.62,1923.62 2915,1890 2810.02,1890 2799.29,1900.73 2799.29,1915.86 U1.11
RX0: J1.8 U2.38 | length 637.3
  Top Layer w10: U2.38 2922.77,2295.63 2938.4,2280 v1(2940,2280) ; J1.8 3215.59,2000.91 3215.59,2046.9 3235,2066.31 v1(3235,2070)
  Bottom Layer w10: v1(2940,2280) 3180,2280 3235,2225 v1(3235,2070)
SPI0_MISO: U1.9 U2.26 | length 385.9
  Top Layer w10: U2.26 2718.7,2169.57 2718.7,2072.14 v1(2720.42,2070.42) ; v1(2755,1860) 2767.72,1872.72 U1.9
  Bottom Layer w20: v1(2720.42,2070.42) 2720.42,1895.56 2755,1860.98 v1(2755,1860)
SPI0_MOSI: U1.24 U2.25 | length 174.5
  Top Layer w10: U2.25 2702.87,2102.87 2695,2095 2695,2046.72 2700.86,2040.86 2736.14,2040.86 2736.22,2040.78 U1.24
SPI0_SCLK: U1.23 U2.27 | length 142.9
  Top Layer w10: U2.27 2734.37,2097.27 2751.89,2079.75 2751.89,2034.13 U1.23
SPI0_SS: U1.22 U2.28 | length 142.9
  Top Layer w10: U2.28 2750.12,2104.88 2767.72,2087.28 U1.22
SPI1_MISO: U2.18 U6.2 | length 828.5
  Top Layer w10: U6.2 2413.79,1949.99 2538.79,1825 2650.99,1825 2656.85,1830.86 2656.85,1869.14 2650.99,1875 2587.85,1875 2530,1932.85 2530,2079.02 2583.07,2132.09 2592.64,2141.65 U2.18
SPI1_MOSI: U2.17 U6.5 | length 444
  Top Layer w10: U2.17 2576.89,2147.17 2576.81,2147.09 2572.09,2147.09 2505,2080 2505,1880 2535.01,1849.99 U6.5
SPI1_SCLK: U2.19 U6.6 | length 332.6
  Top Layer w10: U2.19 2608.39,2133.39 2550,2075 2550,1943.69 2593.7,1899.99 U6.6
SPI1_SS: U2.20 U6.1 | length 422.5
  Top Layer w10: U6.1 2339.42,2002.6 2395.79,2002.6 2530,2136.81 2530,2166.5 2570.71,2207.2 2614.57,2207.2 2624.06,2197.72 2624.06,2169.72 U2.20
SPI2_MISO: U2.12 U5.6 | length 749.1
  Top Layer w10: U5.6 1971.1,2201.1 2005,2235 2427.78,2235 2472.66,2279.88 U2.12
SPI2_MOSI: U2.13 U5.5 | length 776.8
  Top Layer w10: v1(1920,1990) 1920,2042.09 U5.5 ; v1(2195,2205) 2375,2205 2390,2220 2433.99,2220 2478.05,2264.06 U2.13 U2.13
  Bottom Layer w10: v1(1920,1990) 2135,2205 v1(2195,2205)
SPI2_SCLK: U2.11 U5.4 | length 846.8
  Top Layer w10: U5.4 1871.1,2186.1 1935,2250 2421.57,2250 2467.2,2295.63 U2.11
SPI2_SS: U2.10 U5.3 | length 903.3
  Top Layer w10: U5.3 1821.1,2186.1 1900,2265 2415.35,2265 2461.73,2311.38 U2.10
TX0: J1.6 U2.37 | length 530.3
  Top Layer w10: U2.37 2860.43,2279.8 2905.2,2279.8 v1(2940,2245) ; v1(3165,2070) 3165,2067.81 3175.32,2057.5 J1.6
  Bottom Layer w10: v1(2940,2245) 3100,2245 3165,2180 v1(3165,2070)
V33: C3.1 C10.2@2560.59,2580.01 C17.1 C18.1 L1.2 R1.2@3279.53,2265.01 R2.2 R3.2 U1.13 U2.62 U4.5 U5.1 U6.3 U6.7 U6.8 | length 5117.6
  Top Layer w10: C10.2@2560.59,2578.04 2571.34,2567.29 2581.28,2567.29 2608.31,2540.27 2608.31,2500.43 U2.62 ; U1.13 2836.79,1935.7 2864.32,1935.7 2878.03,1949.41 C3.1 2886.77,1942.64 2904.13,1960 v1(2920,1960)
  Top Layer w15: v1(3070,3335) C17.1 3038.84,3326.75 3038.84,3315.37 3071.42,3282.8 U4.5
  Top Layer w20: U5.1 1721.1,1918.9 1745,1895 v1(2225,1895) 2225.3,1895.3 2269.71,1895.3 C18.1 2273.72,1899.3 2336.12,1899.3 U6.3 ; C10.2@2560.59,2578.04 2560.59,2580.01 2560.59,2581.97 2604.31,2625.69 2604.31,2629.31 v1(2605,2630) ; U6.7 U6.8 ; U6.7@2636.87,1950 v1(2655,1950) ; v1(2870,2625) 2888.19,2606.81 2890.64,2606.81 2902.29,2595.16 2904.25,2595.16 L1.2 ; v1(2895,2125) 3269.53,2125 3279.76,2135.24 3279.76,2264.77 R1.2@3279.53,2265.01
  Bottom Layer w20: v1(2225,1895) 2605,1895 2655,1845 ; v1(2605,2630) 2730,2630 ; v1(2655,1950) 2655,1845 ; v1(2895,2125) 2895,1985.98 2920,1960.98 v1(2920,1960) 2919.31,1959.31 2919.31,1876.72 2907.59,1865 2840,1865 2808.19,1833.19 ; v1(3070,3335) 2870,3335 2775,3240 2775,2970 2870,2875 2870,2776.72 2858.28,2765 2741.72,2765 2730,2753.28 2730,2630 ; 2655,1845 2666.81,1833.19 2808.19,1833.19 ; 2730,2630 2864.02,2630 2869.02,2625 v1(2870,2625) 2870.69,2624.31 2888.28,2624.31 2900,2612.59 2900,2390 2808.19,2298.19 2808.19,1833.19
VBAT: C11.2 C15.1 J2.2 Q1.2 R1.2@3010.01,2940.47 U2.3 U3.3 | length 2851.4
  Top Layer w10: C11.2@2465.59,2443.04 2486.94,2421.69 2529.57,2421.69 U2.3
  Top Layer w15: v1(2375,2480) 2445.69,2480 2447.34,2478.35 2447.34,2465.23 2465.59,2446.97 C11.2@2465.59,2443.04 ; U3.3@2912.01,2869.8 U3.3@2912.01,2891.18 ; U3.3@2912.03,2869.78 2993.56,2869.78 3002.34,2878.56 3002.34,2891.75 C15.1 ; R1.2@3010.01,2940.47 3090.47,2940.47 3116.83,2966.83 3116.83,3183.52 ; Q1.2 3085.71,3152.4 3116.83,3183.52 ; J2.2 3125.08,3211.38 3116.83,3203.13 3116.83,3183.52
  Top Layer w20: R1.2@3010.01,2940.47 3010.3,2940.18 3010.3,2900.29 C15.1
  Bottom Layer w20: v1(2375,2480) 2375,3110 2650,3385 3065,3385 3145,3305 3145,3180 2995,3030 v1(2995,2860)
Vref: C4.2 R15.1 R16.1 R17.1 R18.1 R19.1 R20.1 R21.1 R22.1 U2.51 | length 1030
  Top Layer w10: U2.51 2781.61,2577.2 C4.2@2784.41,2579.99
  Top Layer w15: C4.2@2784.41,2580.59 2785.22,2579.78 2792.66,2579.78 2814.93,2557.5 2932.5,2557.5 2955,2580 2955,2605 v1(3065,2715) ; C4.2@2784.41,2588.03 C4.2
  Bottom Layer w20: v1(3065,2715) 3035,2745 3035,2778.28 3046.72,2790 3141,2790 3152.72,2778.28 3152.72,2721.82 R22.1 R21.1 R20.1 R19.1 R18.1 R17.1 R16.1 R15.1
VSS: C1.2 C2.2 C3.2 C4.1 C5.1 C7.2 C8.2 C9.2 C10.1@2509.41,2580.01 C10.2@2234.41,2404.99 C11.1 C12.1 C13.1 C14.2 C15.2 C16.2 C17.2 C18.2 J1. J1.1 J1.12 J2.1 J3. J3.1 L2.2 Q3.2 R8.2 R9.2 R12.2 R14.2 SW1.2 U1.18 U1.20 U1.25 U2.16 U2.61 U2.63 U3.2 U4.2 U5.8 U6.4 | length 8863.3
  Top Layer w10: C13.1 2466.96,2119.41 2512.91,2165.36 2512.91,2216.81 2512.99,2216.89 U2.16 ; C10.1@2509.41,2578.04 2539.59,2547.86 2573.13,2547.86 2592.56,2528.42 U2.63 U2.63 2592.72,2500.28 2592.72,2462.28 2605,2450 2614.14,2450 2624.06,2459.91 2624.06,2500.28 U2.61 ; U1.25 2799.21,1998.62 U1.20 2799.29,2034.13 2799.29,2054.14 2805.15,2060 2830,2060 2836.71,2053.29 U1.18 2836.79,2014.29 2864.33,2014.29 2878.03,2000.59 C3.2 2880.58,2000 2885.58,2005 v1(2926.81,2005) ; L2.2@3130.59,2355.64 3130.59,2356.97 3155,2381.39 J3.1
  Top Layer w15: R8.2 2795.91,2935.47 2800.22,2931.16 2800.22,2928.79 2809.01,2920 2866.23,2920 ; R12.2@2930.29,3273.84 2925.98,3269.53 R12.2 2929.3,3265.22 2938.6,3265.22 2958.82,3245 U4.2 2989.98,3245.02 3001.2,3256.24 ; C16.2@2930.29,3329.71 C16.2 C17.2 2979.41,3333.03 3001.2,3311.23 3001.2,3256.24 ; C15.2 2959.41,2901.96 2951.16,2910.21 2921.3,2910.21 2911.51,2920 2866.23,2920 ; J2.1 3005.55,3260.59 3001.2,3256.24 ; J3.@3246.34,2709.69 3246.34,2782.55 3237.55,2791.34 2908.66,2791.34 2875,2825 U3.2 2875.02,2911.21 2866.23,2920
  Top Layer w20: v1(2070,1990) 2070.55,1990.55 2070.55,2042.64 U5.8 ; v1(2225,1845) 2225.3,1844.7 2269.71,1844.7 C18.2 2274.9,1849.3 2336.12,1849.3 U6.4 ; C9.2 2234.41,2404.99 2240.16,2410.74 C10.2@2240.16,2412.71 ; 2379.64,2133.66 2409.25,2133.66 C12.1 2416.96,2139.41 2431.21,2125.16 2459.25,2125.16 C13.1 ; C11.1 2270.93,2445.01 2254.3,2428.38 2254.3,2426.85 C10.2@2240.16,2412.71 ; C10.1@2509.41,2578.04 C10.1@2510,2578.63 ; v1(2560,2635) 2559.31,2634.31 2521.72,2634.31 2510,2622.59 C10.1@2510,2578.63 ; C7.2 2754.7,2785.3 2705.88,2785.3 2725,2804.42 v1(2725,2845) SW1.2@2725,2935 ; R8.2 2789.77,2935.24 2725.24,2935.24 SW1.2@2725,2935 ; C5.1 C4.1 2839.89,2585.69 2869.31,2585.69 v1(2870,2585) ; R14.2@2835.9,3099.53 v1@2859.31,3122.94 ; C2.2 C1.2 ; v1(2860,3120) 2860.69,3119.31 2860.69,3092.9 2890.88,3062.71 2898.66,3062.71 2900.47,3060.9 R9.2 ; v1@2860.02,3123.64 v1@2859.31,3122.94 ; v1(2870,1825) 2870.69,1824.31 J1.@3005.93,1824.31 ; C15.2 2959.71,2900.29 2959.71,2910.21 2959.71,2944.11 C14.2 ; J1.@3014.88,1812.6 J1.@3014.88,1960.75 ; J1.@3014.88,1977.17 J1.@3014.88,1960.75 ; v1(3015,2055) J1.1@3057.36,2012.64 ; L2.2@3130.59,2355.64 3136.33,2361.39 3176.98,2361.39 3226.85,2411.26 3246.54,2411.26 3246.34,2411.46 J3.@3246.34,2709.69 ; J1.12 3311.14,1990.39 3312.95,1988.58 J1.@3346.49,1988.58 ; J1.@3355.43,1812.6 J1.@3355.43,1960.75 ; J1.@3355.43,1977.17 J1.@3355.43,1960.75 ; C10.2@2240.16,2412.71 2240.16,2465.16 2353.63,2578.63 C10.1@2510,2578.63 ; SW1.2@2725,2935 2687.03,2972.97 2582.03,2972.97 2565,2990 2565,3075 2583.88,3093.88 2687.03,3093.88 2725,3131.85 2734.69,3141.54 2734.69,3157.13 2762.55,3185 2800.63,3185 2842.4,3143.23 Q3.2 2842.4,3139.29 2844.21,3137.48 2846.18,3137.48 2859.31,3124.35 v1@2859.31,3122.94 ; J1.@3014.88,1960.75 3070.64,1905 3299.68,1905 J1.@3355.43,1960.75
  Bottom Layer w20: v1(2235,2360) 2235,2065 2160,1990 v1(2070,1990) 2069.31,1990.69 2069.31,2024.31 2057.59,2036.02 2041.02,2036.02 2040,2035 1996.72,2035 1985,2023.28 1985,1895 2035,1845 2130,1845 ; v1(2370,2125) 2345,2100 2345,2060 2130,1845 ; v1(2725,2845) 2560,2680 v1(2560,2635) 2600,2595 2859.02,2595 2869.02,2585 v1(2870,2585) ; v1(2860,3120) 2960,3120 v1(3090,3250) ; v1(3015,2055) 2965,2005 v1(2926.81,2005) 2926.81,2004.02 2961.72,1969.12 2961.72,1866.72 2920.69,1825.69 2870.69,1825.69 v1(2870,1825) 2869.02,1825 2839.02,1795 2497.99,1795 2447.99,1845 v1(2225,1845) 2130,1845
X32I: C9.1 R5.1 U2.5 X2.2 | length 279.3
  Top Layer w10: R5.1 2420.9,2335.48 2475.54,2390.12 U2.5
  Top Layer w20: C9.1 2288.09,2312.5 2347.5,2312.5 X2.2 2359.69,2319.69 2393.3,2319.69 2409.09,2335.48 R5.1
X32O: C10.1@2285.59,2404.99 R5.2 U2.4 X2.1 | length 255.9
  Top Layer w10: R5.2 2420.9,2394.53 2432.24,2405.87 U2.4
  Top Layer w20: C10.1@2285.59,2404.99 2287.31,2406.71 2348.28,2406.71 X2.1 2365.75,2408.43 2377.83,2396.34 2413.18,2396.34 R5.2
pads on no net: J1.3 J1.9 J1.10 J2. J3.2 U1.1 U1.2 U1.3 U1.4 U1.5 U1.6 U1.7 U1.14 U1.15 U1.16 U1.17 U1.19 U1.21 U2.2 U2.6 U2.7 U2.8 U2.31 U2.32 U2.33 U2.34 U2.35 U2.36 U2.54 U2.55 U2.56 U2.64 U4.4 U5.9 U5.10 X1.

## Keep-outs
Keep-Out Layer:
  the board outline again, w10

## Text inside footprints (layer, text, board x,y; h text height)
U5: Top Overlay "GND" at 2085.67,2090.98 h20 r90; Top Overlay "IRQ" at 2039.21,2096.89 h20 r90; Top Overlay "MISO" at 1987.64,2097.68 h20 r90; Top Overlay "MOSI" at 1936.46,2095.71 h20 r90; Top Overlay "SCK" at 1886.06,2094.92 h20 r90; Top Overlay "CSN" at 1834.09,2094.13 h20 r90; Top Overlay "CE" at 1784.88,2094.13 h20 r90; Top Overlay "VDD" at 1735.28,2090.98 h20 r90; Top Overlay "GND" at 1683.7,2524.65 h20 r90; Top Overlay "GND" at 2129.76,2524.25 h20 r90; Top Overlay "E01-ML01SP4" at 1912.68,2295.12 h20 r90